# EAGLE board SmartBadge (EAGLE 9.1.3)
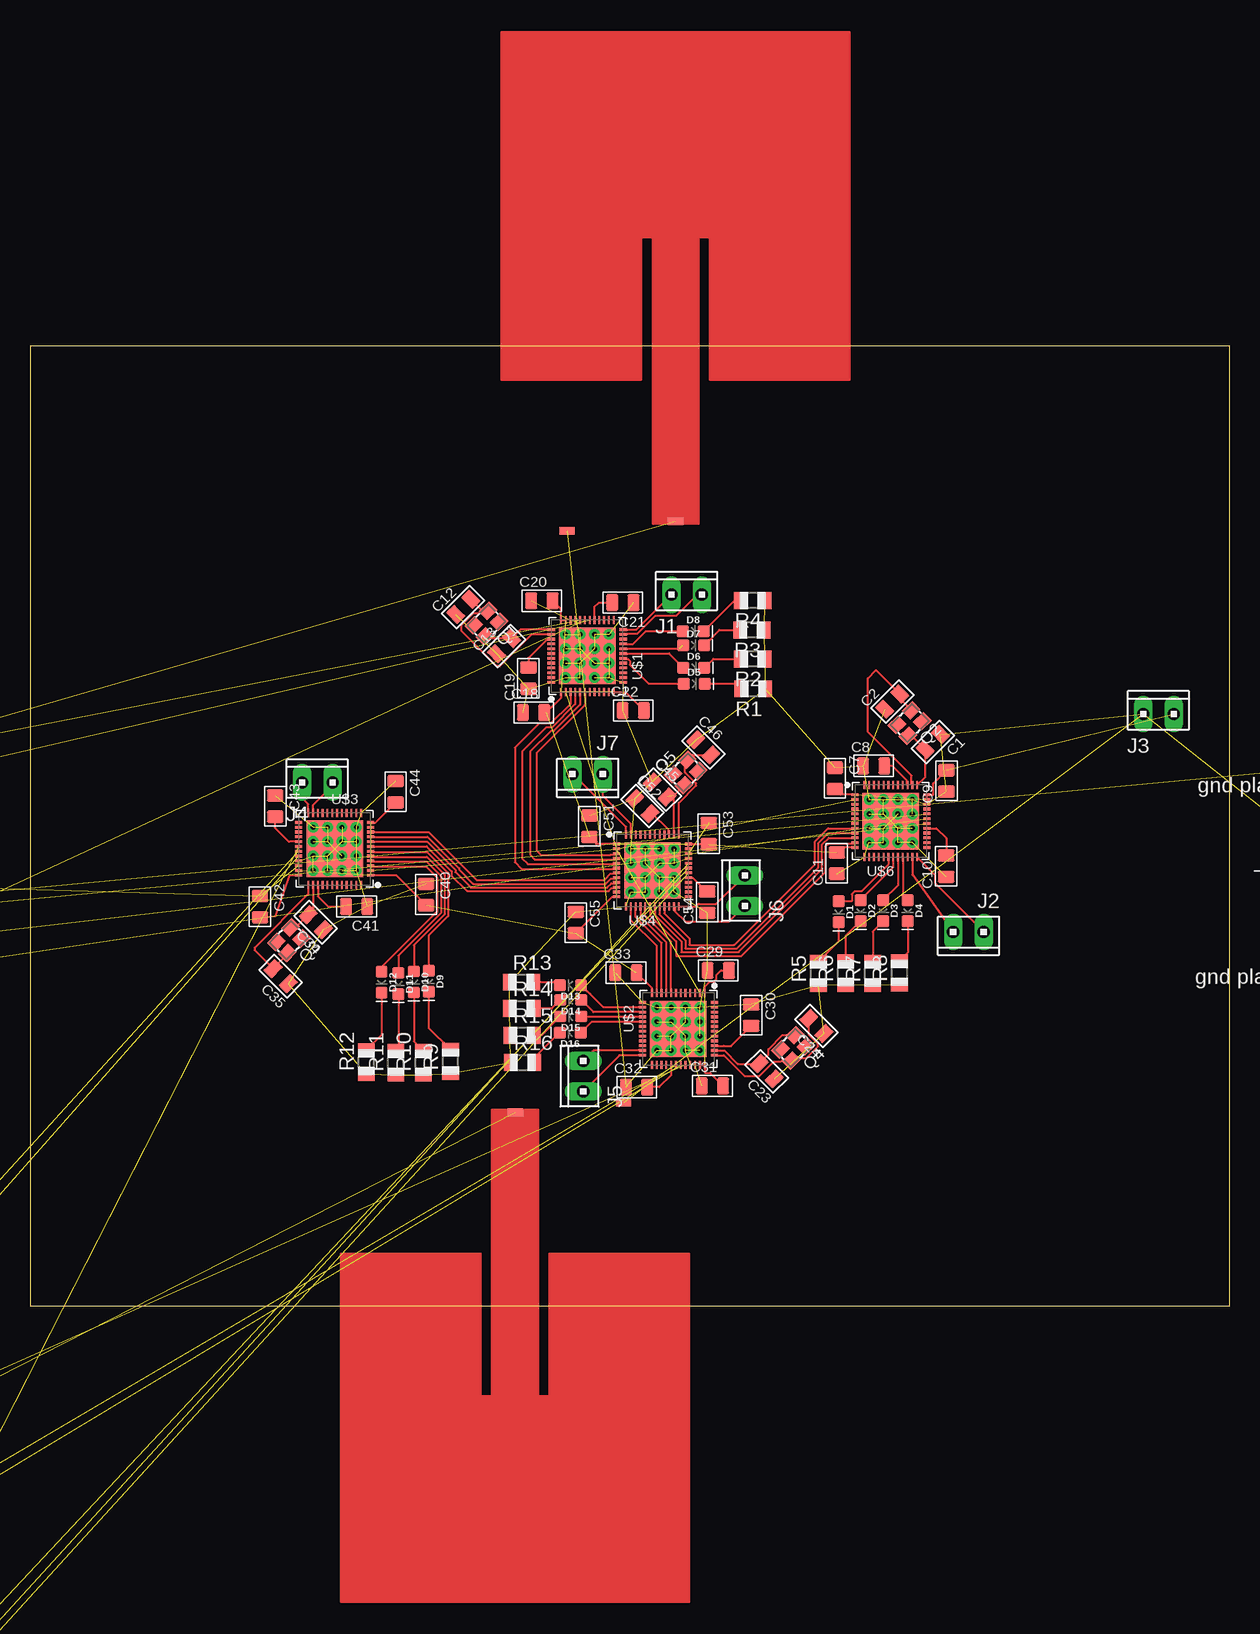
[diagram p0: board, top side]
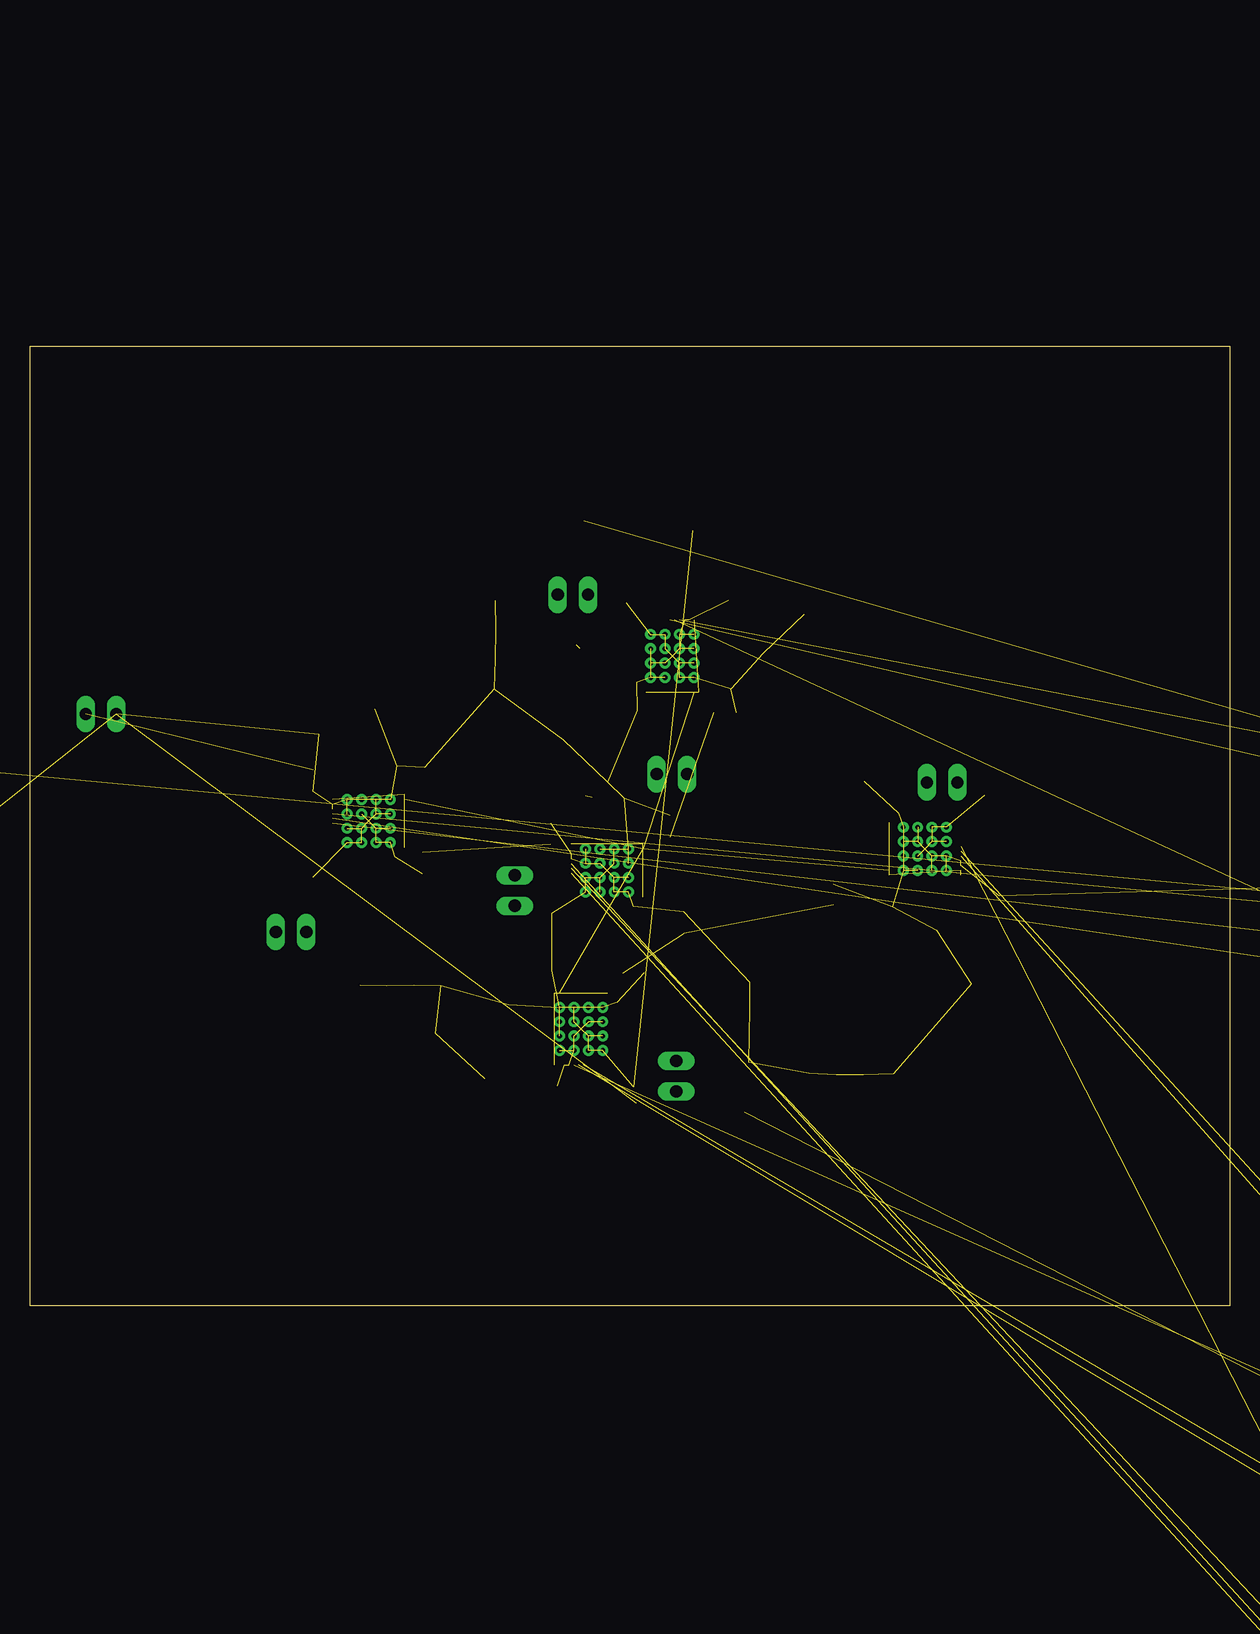
[diagram p1: board, bottom side, seen from below]

Size 100 x 80 mm. Coordinates in mm from the lower left corner, seen from the top.
Outline: 0,0 100,0 100,80 0,80 0,0
Copper layers (1*16): Top 0.035mm / dielectric 1.5mm / Bottom 0.035mm
Design rules "default": minimum track width 6mil, minimum drill 0.35mm, track to track 6mil, track to pad 6mil, pad to pad 6mil, via to via 6mil, smd to smd 6mil, copper to edge 40mil, drill to drill 6mil, minimum pad ring 10mil, minimum via ring 8mil, stop-mask expansion 4mil, vias tented up to drill 0mil, thermal gap 10mil

## Footprints (pad centres in the part's own frame; a part is rotated, then mirrored left to right if it is on the bottom)
C0805 = smd 1.397 x 1.016: 1 0,0.889; 2 0,-0.889
LED-0603 = smd 1 x 1: A -0.877,0; C 0.877,0
TRACE_ANTENNA_2.4GHZ_25.7MM = smd 0.46 x 0.46: ANT 0,0.23 | smd 1 x 0.46: GND -1.18,0.23; GND2 -3.38,0.23
10X02MTA = drill 1.016 long: 1 1.27,0; 2 -1.27,0
RESC0805_L = smd 1 x 1.25: 1 -1,0; 2 1,0
2.5X2.0_KX-6 = smd 1.2 x 1: 1 -0.85,-0.65; 2 0.85,-0.65; 3 0.85,0.65; 4 -0.85,0.65
R0805 = smd 1.1 x 1.4: 1 -1,0; 2 1,0
QFN40P600X600X90-48_N = smd 0.65 x 0.2: 1 -3,2.2; 2 -3,1.8; 3 -3,1.4; 4 -3,1; 5 -3,0.6; 6 -3,0.2; 7 -3,-0.2; 8 -3,-0.6; 9 -3,-1; 10 -3,-1.4; 11 -3,-1.8; 12 -3,-2.2; 25 3,-2.2; 26 3,-1.8; 27 3,-1.4; 28 3,-1; 29 3,-0.6; 30 3,-0.2; 31 3,0.2; 32 3,0.6; 33 3,1; 34 3,1.4; 35 3,1.8; 36 3,2.2 | smd 0.2 x 0.65: 13 -2.2,-3; 14 -1.8,-3; 15 -1.4,-3; 16 -1,-3; 17 -0.6,-3; 18 -0.2,-3; 19 0.2,-3; 20 0.6,-3; 21 1,-3; 22 1.4,-3; 23 1.8,-3; 24 2.2,-3; 37 2.2,3; 38 1.8,3; 39 1.4,3; 40 1,3; 41 0.6,3; 42 0.2,3; 43 -0.2,3; 44 -0.6,3; 45 -1,3; 46 -1.4,3; 47 -1.8,3; 48 -2.2,3 | smd 4.7 x 4.7: PAD 0,0 | drill 0.4: PAD@VIA01 -1.8,1.8; PAD@VIA02 -1.8,0.6; PAD@VIA03 -1.8,-0.6; PAD@VIA04 -1.8,-1.8; PAD@VIA05 -0.6,1.8; PAD@VIA06 -0.6,0.6; PAD@VIA07 -0.6,-0.6; PAD@VIA08 -0.6,-1.8; PAD@VIA09 0.6,1.8; PAD@VIA10 0.6,0.6; PAD@VIA11 0.6,-0.6; PAD@VIA12 0.6,-1.8; PAD@VIA13 1.8,1.8; PAD@VIA14 1.8,0.6; PAD@VIA15 1.8,-0.6; PAD@VIA16 1.8,-1.8
YAGIUDA = smd 3.81 x 34.29: P$1 0,0; P$2 19.265,-0.1; P$3 38.47,0.19 | smd 3.05 x 22.48: P$4 -18.92,11.24 | smd 3.05 x 22.48 bottom: P$5 -18.94,-11.25 | smd 0.406 x 0.203: P$6 -36.299,0 | smd 0.406 x 0.203 bottom: P$7 -36.311,0.012
PATCH = smd 1.27 x 0.635: P$1 -0.018,-11.677; P$2 -9.047,-12.48

## Placement (x,y rotation side)
C1  12pF  [C0805]  75.26,47.02 315 top
C2  12pF  [C0805]  71.88,50.37 135 top
C3  2.2nF  [C0805]  -27.94,29.21 0 top  (outside the outline)
C4  1.0pF  [C0805]  -34.29,29.21 0 top  (outside the outline)
C5  2.2pF  [C0805]  -40.64,29.21 0 top  (outside the outline)
C6  1.5pF  [C0805]  -15.24,34.29 0 top  (outside the outline)
C7  100nF  [C0805]  67.11,43.97 0 top
C8  100nF  [C0805]  70.33,45.01 90 top
C9  1.0nF  [C0805]  76.4,43.76 180 top
C10  47nF  [C0805]  76.38,36.65 180 top
C11  100nF  [C0805]  67.26,36.91 180 top
C12  12pF  [C0805]  36.12,58.27 135 top
C13  12pF  [C0805]  39.52,54.99 135 top
C14  2.2nF  [C0805]  -34.29,39.37 0 top  (outside the outline)
C15  1.0pF  [C0805]  -40.64,39.37 0 top  (outside the outline)
C16  2.2pF  [C0805]  -15.24,44.45 0 top  (outside the outline)
C17  1.5pF  [C0805]  -21.59,44.45 0 top  (outside the outline)
C18  100nF  [C0805]  41.99,49.45 90 top
C19  100nF  [C0805]  41.55,52.32 180 top
C20  1.0nF  [C0805]  42.67,58.78 90 top
C21  47nF  [C0805]  49.43,58.62 270 top
C22  100nF  [C0805]  50.29,49.63 90 top
C23  12pF  [C0805]  61.42,19.56 225 top
C24  12pF  [C0805]  65.56,23.34 225 top
C25  2.2nF  [C0805]  -25.4,-30.48 0 top  (outside the outline)
C26  1.0pF  [C0805]  -19.05,-30.48 0 top  (outside the outline)
C27  2.2pF  [C0805]  -44.45,-36.83 0 top  (outside the outline)
C28  1.5pF  [C0805]  -38.1,-36.83 0 top  (outside the outline)
C29  100nF  [C0805]  57.38,27.97 90 top
C30  100nF  [C0805]  60.12,24.23 0 top
C31  1.0nF  [C0805]  56.9,18.34 90 top
C32  47nF  [C0805]  50.57,18.24 90 top
C33  100nF  [C0805]  49.68,27.76 90 top
C34  12pF  [C0805]  23.83,31.98 225 top
C35  12pF  [C0805]  20.9,27.48 225 top
C36  2.2nF  [C0805]  -19.05,-41.91 0 top  (outside the outline)
C37  1.0pF  [C0805]  -44.45,-46.99 0 top  (outside the outline)
C38  2.2pF  [C0805]  -38.1,-46.99 0 top  (outside the outline)
C39  1.5pF  [C0805]  -31.75,-46.99 0 top  (outside the outline)
C40  100nF  [C0805]  33.02,34.29 0 top
C41  100nF  [C0805]  27.23,33.3 270 top
C42  1.0nF  [C0805]  19.18,33.27 0 top
C43  47nF  [C0805]  20.45,41.66 0 top
C44  100nF  [C0805]  30.48,42.85 0 top
C45  12pF  [C0805]  52.5,43.05 45 top
C46  12pF  [C0805]  56.13,46.56 45 top
C47  2.2nF  [C0805]  -38.1,-74.93 0 top  (outside the outline)
C48  1.0pF  [C0805]  -31.75,-74.93 0 top  (outside the outline)
C49  2.2pF  [C0805]  -44.45,-80.01 0 top  (outside the outline)
C50  1.5pF  [C0805]  -38.1,-80.01 0 top  (outside the outline)
C51  100nF  [C0805]  46.63,39.98 0 top
C52  100nF  [C0805]  51.05,41.66 45 top
C53  1.0nF  [C0805]  56.59,39.37 0 top
C54  47nF  [C0805]  56.46,33.66 180 top
C55  100nF  [C0805]  45.49,31.95 0 top
D1  [LED-0603]  67.41,32.84 270 top
D2  [LED-0603]  69.24,32.94 270 top
D3  [LED-0603]  71.12,32.94 270 top
D4  [LED-0603]  73.18,32.94 270 top
D5  [LED-0603]  55.37,51.87 0 top
D6  [LED-0603]  55.35,53.19 0 top
D7  [LED-0603]  55.32,55.07 0 top
D8  [LED-0603]  55.3,56.24 0 top
D9  [LED-0603]  33.25,27.05 270 top
D10  [LED-0603]  32,27 270 top
D11  [LED-0603]  30.71,26.87 270 top
D12  [LED-0603]  29.31,26.97 270 top
D13  [LED-0603]  45.06,26.75 180 top
D14  [LED-0603]  45.09,25.5 180 top
D15  [LED-0603]  45.09,24.13 180 top
D16  [LED-0603]  45.03,22.78 180 top
E1  ANTENNA-GROUNDEDTRACE-25.7MM  [TRACE_ANTENNA_2.4GHZ_25.7MM]  -35.79,-90.73 0 top  (outside the outline)
J1  [10X02MTA]  54.74,59.28 0 top
J2  [10X02MTA]  78.23,31.17 180 top
J3  [10X02MTA]  94.08,49.33 0 top
J4  [10X02MTA]  23.95,43.64 0 top
J5  [10X02MTA]  46.13,19.15 90 top
J6  [10X02MTA]  59.59,34.62 90 top
J7  [10X02MTA]  46.48,44.32 180 top
L1  4.7nH  [RESC0805_L]  -45.72,15.24 0 top  (outside the outline)
L2  10nH  [RESC0805_L]  -36.83,24.13 0 top  (outside the outline)
L3  3.3nH  [RESC0805_L]  -17.78,24.13 0 top  (outside the outline)
L4  4.7nH  [RESC0805_L]  -24.13,24.13 0 top  (outside the outline)
L5  10nH  [RESC0805_L]  -43.18,24.13 0 top  (outside the outline)
L6  3.3nH  [RESC0805_L]  -30.48,24.13 0 top  (outside the outline)
L7  4.7nH  [RESC0805_L]  -45.72,-24.13 0 top  (outside the outline)
L8  10nH  [RESC0805_L]  -20.32,-24.13 0 top  (outside the outline)
L9  3.3nH  [RESC0805_L]  -39.37,-24.13 0 top  (outside the outline)
L10  4.7nH  [RESC0805_L]  -33.02,-24.13 0 top  (outside the outline)
L11  10nH  [RESC0805_L]  -45.72,-30.48 0 top  (outside the outline)
L12  3.3nH  [RESC0805_L]  -26.67,-24.13 0 top  (outside the outline)
L13  4.7nH  [RESC0805_L]  -31.75,-57.15 0 top  (outside the outline)
L14  10nH  [RESC0805_L]  -39.37,-68.58 0 top  (outside the outline)
L15  3.3nH  [RESC0805_L]  -45.72,-68.58 0 top  (outside the outline)
Q1  [2.5X2.0_KX-6]  38.05,56.87 225 top
Q2  [2.5X2.0_KX-6]  73.33,48.59 225 top
Q3  [2.5X2.0_KX-6]  21.59,30.48 225 top
Q4  [2.5X2.0_KX-6]  63.63,21.51 225 top
Q5  [2.5X2.0_KX-6]  54.66,44.45 45 top
R1  R-US_R0805  [R0805]  60.3,51.44 180 top
R2  R-US_R0805  [R0805]  60.25,53.92 180 top
R3  R-US_R0805  [R0805]  60.2,56.34 180 top
R4  R-US_R0805  [R0805]  60.25,58.8 180 top
R5  R-US_R0805  [R0805]  65.74,27.71 90 top
R6  R-US_R0805  [R0805]  68,27.74 90 top
R7  R-US_R0805  [R0805]  70.26,27.71 90 top
R8  R-US_R0805  [R0805]  72.49,27.76 90 top
R9  R-US_R0805  [R0805]  35.05,20.37 90 top
R10  R-US_R0805  [R0805]  32.79,20.27 90 top
R11  R-US_R0805  [R0805]  30.51,20.27 90 top
R12  R-US_R0805  [R0805]  28.04,20.32 90 top
R13  R-US_R0805  [R0805]  40.97,26.97 0 top
R14  R-US_R0805  [R0805]  41,24.79 0 top
R15  R-US_R0805  [R0805]  41.02,22.56 0 top
R16  R-US_R0805  [R0805]  41.07,20.29 0 top
U$1  NRF51X22_QFQF  [QFN40P600X600X90-48_N]  46.46,54.18 90 top
U$2  NRF51X22_QFQF  [QFN40P600X600X90-48_N]  54.05,23.09 270 top
U$3  NRF51X22_QFQF  [QFN40P600X600X90-48_N]  25.4,38.1 180 top
U$4  NRF51X22_QFQF  [QFN40P600X600X90-48_N]  51.89,36.3 0 top
U$5  YAGI_UDA  [YAGIUDA]  143.74,35.26 0 top  (outside the outline)
U$6  NRF51X22_QFQF  [QFN40P600X600X90-48_N]  71.75,40.41 0 top
U$7  YAGI_UDA  [YAGIUDA]  -91.34,38 180 top  (outside the outline)
U$8  2.4G_PATCH  [PATCH]  53.82,77.09 0 top
U$9  2.4G_PATCH  [PATCH]  40.44,4.45 180 top

## Library data of the parts
C1-C55 = Seeed-Capacitor; MPN: CC0805MKX5R5BB226
D1-D16 = SparkFun-LED; PROD_ID: DIO-00821
E1 = SparkFun-RF
J1-J7 = con-amp
L1-L15 U$1-U$4 U$6 = Nordic_nRF
Q1-Q5 = crystal-geyer_V1_0
R1-R16 = audio amplifier example
U$5 U$7 = Myown
U$8 U$9 = Patch

## Nets
0: C1.1 C2.1 C3.1 C4.1 C6.1 C7.1 C8.1 C9.1 C10.1 C11.1 C12.1 C13.1 C14.1 C15.1 C17.1 C18.1 C19.1 C20.1 C21.1 C22.1 C23.1 C24.1 C25.1 C26.1 C28.1 C29.1 C30.1 C31.1 C32.1 C33.1 C34.1 C35.1 C36.1 C37.1 C39.1 C40.1 C41.1 C42.1 C43.1 C44.1 C45.1 C46.1 C47.1 C48.1 C50.1 C51.1 C52.1 C53.1 C54.1 C55.1 E1.GND E1.GND2 J3.2 R1.1 R2.1 R3.1 R4.1 R5.1 R6.1 R7.1 R8.1 R9.1 R10.1 R11.1 R12.1 R13.1 R14.1 R15.1 R16.1 U$1.13 U$1.33 U$1.34 U$1.PAD U$1.PAD@VIA01 U$1.PAD@VIA02 U$1.PAD@VIA03 U$1.PAD@VIA04 U$1.PAD@VIA05 U$1.PAD@VIA06 U$1.PAD@VIA07 U$1.PAD@VIA08 U$1.PAD@VIA09 U$1.PAD@VIA10 U$1.PAD@VIA11 U$1.PAD@VIA12 U$1.PAD@VIA13 U$1.PAD@VIA14 U$1.PAD@VIA15 U$1.PAD@VIA16 U$2.13 U$2.33 U$2.34 U$2.PAD U$2.PAD@VIA01 U$2.PAD@VIA02 U$2.PAD@VIA03 U$2.PAD@VIA04 U$2.PAD@VIA05 U$2.PAD@VIA06 U$2.PAD@VIA07 U$2.PAD@VIA08 U$2.PAD@VIA09 U$2.PAD@VIA10 U$2.PAD@VIA11 U$2.PAD@VIA12 U$2.PAD@VIA13 U$2.PAD@VIA14 U$2.PAD@VIA15 U$2.PAD@VIA16 U$3.13 U$3.33 U$3.34 U$3.PAD U$3.PAD@VIA01 U$3.PAD@VIA02 U$3.PAD@VIA03 U$3.PAD@VIA04 U$3.PAD@VIA05 U$3.PAD@VIA06 U$3.PAD@VIA07 U$3.PAD@VIA08 U$3.PAD@VIA09 U$3.PAD@VIA10 U$3.PAD@VIA11 U$3.PAD@VIA12 U$3.PAD@VIA13 U$3.PAD@VIA14 U$3.PAD@VIA15 U$3.PAD@VIA16 U$4.13 U$4.33 U$4.34 U$4.PAD U$4.PAD@VIA01 U$4.PAD@VIA02 U$4.PAD@VIA03 U$4.PAD@VIA04 U$4.PAD@VIA05 U$4.PAD@VIA06 U$4.PAD@VIA07 U$4.PAD@VIA08 U$4.PAD@VIA09 U$4.PAD@VIA10 U$4.PAD@VIA11 U$4.PAD@VIA12 U$4.PAD@VIA13 U$4.PAD@VIA14 U$4.PAD@VIA15 U$4.PAD@VIA16 U$5.P$5 U$6.13 U$6.33 U$6.34 U$6.PAD U$6.PAD@VIA01 U$6.PAD@VIA02 U$6.PAD@VIA03 U$6.PAD@VIA04 U$6.PAD@VIA05 U$6.PAD@VIA06 U$6.PAD@VIA07 U$6.PAD@VIA08 U$6.PAD@VIA09 U$6.PAD@VIA10 U$6.PAD@VIA11 U$6.PAD@VIA12 U$6.PAD@VIA13 U$6.PAD@VIA14 U$6.PAD@VIA15 U$6.PAD@VIA16 U$7.P$5 U$8.P$2 U$9.P$2
DCC: U$1.2 U$2.2 U$3.2 U$4.2 U$6.2
N$1: C8.2 U$6.39
N$2: C1.2 Q2.3 U$6.37
N$3: C10.2 U$6.29
N$4: C2.2 Q2.1 U$6.38
N$5: C5.1 L1.2 U$6.32
N$6: L1.1 L2.2 U$6.31
N$7: C3.2 L2.1 U$6.30
N$8: C4.2 C5.2 L3.1
N$9: C6.2 L3.2 U$5.P$4
N$10: C13.2 Q1.3 U$1.37
N$11: C12.2 Q1.1 U$1.38
N$12: C19.2 U$1.39
N$13: C21.2 U$1.29
N$14: C16.1 L4.2 U$1.32
N$15: L4.1 L5.2 U$1.31
N$16: C14.2 L5.1 U$1.30
N$17: C15.2 C16.2 L6.1
N$18: C17.2 L6.2 U$8.P$1
N$19: C24.2 Q4.3 U$2.37
N$20: C23.2 Q4.1 U$2.38
N$21: C30.2 U$2.39
N$22: C32.2 U$2.29
N$23: C27.1 L7.2 U$2.32
N$24: L7.1 L8.2 U$2.31
N$25: C25.2 L8.1 U$2.30
N$26: C26.2 C27.2 L9.1
N$27: C28.2 L9.2 U$9.P$1
N$28: C35.2 Q3.3 U$3.37
N$29: C34.2 Q3.1 U$3.38
N$30: C41.2 U$3.39
N$31: C43.2 U$3.29
N$32: C38.1 L10.2 U$3.32
N$33: L10.1 L11.2 U$3.31
N$34: C36.2 L11.1 U$3.30
N$35: C37.2 C38.2 L12.1
N$36: C39.2 L12.2 U$7.P$4
N$37: C46.2 Q5.3 U$4.37
N$38: C45.2 Q5.1 U$4.38
N$39: C52.2 U$4.39
N$40: C54.2 U$4.29
N$41: C49.1 L13.2 U$4.32
N$42: L13.1 L14.2 U$4.31
N$43: C47.2 L14.1 U$4.30
N$44: C48.2 C49.2 L15.1
N$45: C50.2 E1.ANT L15.2
N$46: U$1.6 U$4.3
N$47: U$1.5 U$4.4
N$48: U$1.4 U$4.5
N$49: U$1.3 U$4.6
N$50: J6.2 U$4.23
N$51: U$4.41
N$52: U$4.42
N$53: U$4.43
N$54: U$3.7 U$4.10
N$55: U$3.8 U$4.9
N$56: U$3.9 U$4.8
N$57: U$3.10 U$4.7
N$58: U$2.8 U$4.17
N$59: U$2.9 U$4.16
N$60: U$2.10 U$4.15
N$61: U$2.11 U$4.14
N$62: D1.A U$6.18
N$63: D2.A U$6.19
N$64: D3.A U$6.20
N$65: D4.A U$6.21
N$66: D5.A U$1.18
N$67: D6.A U$1.19
N$68: D7.A U$1.20
N$69: D8.A U$1.21
N$70: D12.A U$3.3
N$71: D11.A U$3.4
N$72: D10.A U$3.5
N$73: D9.A U$3.6
N$74: D13.A U$2.14
N$75: D14.A U$2.15
N$76: D15.A U$2.16
N$77: D16.A U$2.17
N$78: D5.C R1.2
N$79: D6.C R2.2
N$80: D7.C R3.2
N$81: D8.C R4.2
N$82: D1.C R5.2
N$83: D2.C R6.2
N$84: D3.C R7.2
N$85: D4.C R8.2
N$86: D13.C R13.2
N$87: D14.C R14.2
N$88: D15.C R15.2
N$89: D16.C R16.2
N$90: D12.C R12.2
N$91: D11.C R11.2
N$92: D10.C R10.2
N$93: D9.C R9.2
N$94: U$4.21 U$6.8
N$95: U$4.20 U$6.9
N$96: J4.1 U$3.23
N$97: J4.2 U$3.24
N$98: J5.1 U$2.23
N$99: J5.2 U$2.24
N$102: J2.1 U$6.23
N$103: J2.2 U$6.24
N$104: J1.1 U$1.23
N$105: J1.2 U$1.24
N$106: J6.1 U$4.24
N$107: U$4.19 U$6.10
N$108: U$4.18 U$6.11
N$109: J7.1 U$4.48
N$110: J7.2 U$4.47
VCC: C7.2 C9.2 C11.2 C18.2 C20.2 C22.2 C29.2 C31.2 C33.2 C40.2 C42.2 C44.2 C51.2 C53.2 C55.2 J3.1 U$1.1 U$1.12 U$1.35 U$1.36 U$2.1 U$2.12 U$2.35 U$2.36 U$3.1 U$3.12 U$3.35 U$3.36 U$4.1 U$4.12 U$4.35 U$4.36 U$6.1 U$6.12 U$6.35 U$6.36

## Tracks (layer width: path | path; a pad name or v marks a point on that pad's centre or on a via)
0  (172 unrouted)
DCC  (4 unrouted)
N$1
  Top 0.152: U$6.39 73.08,43.48 73.08,43.81 71.89,45.01 C8.2
N$2
  Top 0.152: U$6.37 74.63,44.09 C1.2 73.49,47.53 Q2.3
N$3
  Top 0.152: U$6.29 75.56,39.81 76.38,38.99 C10.2
N$4
  Top 0.152: U$6.38 73.48,43.48 73.48,44.2 69.84,47.84 69.84,52.31 70.52,52.99 C2.2 72.51,50.61 Q2.1
N$5  (2 unrouted)
N$6  (2 unrouted)
N$7  (2 unrouted)
N$8  (2 unrouted)
N$9  (2 unrouted)
N$10
  Top 0.152: U$1.37 40.91,56.38 C13.2 38.1,55.62 Q1.3
N$11
  Top 0.152: U$1.38 41.82,55.98 39.18,53.33 38.88,53.33 35.98,56.23 35.98,56.75 36.97,57.74 37.99,57.74 Q1.1 37.71,57.93 C12.2
N$12
  Top 0.152: U$1.39 43.38,55.51 43.05,55.51 41.55,54.01 C19.2
N$13
  Top 0.152: U$1.29 47.06,58.23 47.04,58.24 47.42,58.62 C21.2
N$14  (2 unrouted)
N$15  (2 unrouted)
N$16  (2 unrouted)
N$17  (2 unrouted)
N$18  (2 unrouted)
N$19
  Top 0.152: U$2.37 57.85,20.89 59.58,19.16 60.8,19.16 62.01,20.37 62.59,20.37 62.68,20.45 Q4.3 63.68,20.65 64.71,20.65 65.69,21.63 65.69,21.82 64.93,22.59 C24.2
N$20
  Top 0.152: U$2.38 57.88,21.29 58.98,20.19 C23.2 61.56,20.96 61.56,21.4 62.74,22.57 Q4.1
N$21
  Top 0.152: U$2.39 57.84,21.69 57.86,21.67 58.45,21.67 C30.2
N$22
  Top 0.152: U$2.29 53.45,19.27 53.47,19.25 52.45,18.24 C32.2
N$23  (2 unrouted)
N$24  (2 unrouted)
N$25  (2 unrouted)
N$26  (2 unrouted)
N$27  (2 unrouted)
N$28
  Top 0.152: U$3.37 23.2,34.33 18.72,29.84 18.72,29.67 C35.2 21.45,29.28 Q3.3
N$29
  Top 0.152: U$3.38 23.6,33.01 C34.2 22.13,31.54 Q3.1
N$30
  Top 0.152: U$3.39 24,34.14 24.84,33.3 C41.2
N$31
  Top 0.152: U$3.29 21.63,38.7 21.61,38.68 20.45,39.85 C43.2
N$32  (2 unrouted)
N$33  (2 unrouted)
N$34  (2 unrouted)
N$35  (2 unrouted)
N$36  (2 unrouted)
N$37
  Top 0.152: U$4.37 54.09,41.93 55.53,43.37 55.53,43.55 54.61,44.47 54.61,45.31 Q5.3 55.22,45.93 C46.2
N$38  (1 unrouted)
  Top 0.152: U$4.38 53.69,42.56 Q5.1
N$39
  Top 0.152: U$4.39 53.22,39.37 53.22,39.7 51.83,41.09 C52.2
N$40
  Top 0.152: U$4.29 55.22,35.7 56.42,34.5 C54.2
N$41  (2 unrouted)
N$42  (2 unrouted)
N$43  (2 unrouted)
N$44  (2 unrouted)
N$45  (2 unrouted)
N$46
  Top 0.152: U$1.6 46.26,50.09 42.24,46.07 42.24,37.97 42.62,37.59 48.36,37.59 48.4,37.62 48.82,37.62 U$4.3
N$47
  Top 0.152: U$1.5 45.86,50.12 43.66,47.92 43.42,47.92 41.69,46.19 41.69,37.61 42.08,37.23 48.82,37.23 U$4.4
N$48
  Top 0.152: U$1.4 45.46,50.15 43.53,48.22 43.03,48.22 41.04,46.22 41.04,37.31 41.52,36.83 48.82,36.83 U$4.5
N$49
  Top 0.152: U$4.6 48.82,36.42 40.99,36.42 40.43,36.98 40.43,46.54 42.42,48.53 43.4,48.53 45.06,50.18 U$1.3
N$50
  Top 0.152: U$4.23 53.76,33.23 53.76,32.89 54.63,32.03 58.27,32.03 J6.2
N$54
  Top 0.152: U$3.7 33.08,38.3 35.17,36.21 35.17,35.85 36.45,34.57 48.23,34.57 48.49,34.83 48.82,34.83 U$4.10
N$55
  Top 0.152: U$3.8 33.11,38.7 35.47,36.34 35.47,36.16 36.75,34.87 48.11,34.87 48.46,35.23 48.82,35.23 U$4.9
N$56
  Top 0.152: U$3.9 33.14,39.1 35.78,36.47 35.78,36.36 36.96,35.18 47.98,35.18 48.43,35.62 48.82,35.62 U$4.8
N$57
  Top 0.152: 28.47,39.43 U$3.10 33.22,39.5 37.21,35.51 47.88,35.51 48.4,36.02 48.82,36.02 U$4.7
N$58
  Top 0.152: U$2.8 53.45,30.37 51.28,32.54 51.28,33.29 U$4.17
N$59
  Top 0.152: U$2.9 53.05,30.29 50.93,32.41 50.93,33.26 U$4.16
N$60
  Top 0.152: U$2.10 52.65,30.25 50.47,32.44 50.47,33.27 U$4.15
N$61
  Top 0.152: U$2.11 52.25,29.99 50.11,32.13 50.11,33.27 U$4.14
N$62
  Top 0.152: U$6.18 71.56,36.78 69.32,34.55 68.73,34.55 68.51,34.33 68.51,33.74 68.49,33.72 D1.A
N$63
  Top 0.152: U$6.19 71.95,36.55 69.24,33.83 D2.A
N$64
  Top 0.152: U$6.20 72.36,35.06 D3.A
N$65
  Top 0.152: U$6.21 72.75,34.24 D4.A
N$66
  Top 0.152: U$1.18 49.53,53.91 49.86,53.91 50.01,53.76 50.01,53.42 51.57,51.87 D5.A
N$67
  Top 0.152: U$1.19 53.28,54.38 D6.A
N$68  (1 unrouted)
  Top 0.152: U$1.20 54.16,54.78
N$69
  Top 0.152: U$1.21 50.28,55.18 51.33,56.24 D8.A
N$70
  Top 0.152: U$3.3 28.47,36.63 33.03,36.63 33.95,35.71 33.95,32.87 29.31,28.24 D12.A
N$71
  Top 0.152: U$3.4 28.47,37.03 33.06,37.03 34.25,35.83 34.25,32.75 30.71,29.2 D11.A
N$72
  Top 0.152: U$3.5 28.47,37.43 33.09,37.43 34.56,35.96 34.56,32.62 32,30.07 D10.A
N$73
  Top 0.152: U$3.6 28.47,37.83 33.12,37.83 34.86,36.09 34.86,32.49 33.25,30.88 D9.A
N$74
  Top 0.152: U$2.14 47.79,24.89 46.69,25.99 46.69,26.01 46.47,26.23 46.45,26.23 D13.A
N$75
  Top 0.152: U$2.15 46.98,24.49 D14.A
N$76
  Top 0.152: U$2.16 46,24.09 D15.A
N$77
  Top 0.152: U$2.17 46.82,23.69 D16.A
N$78
  Top 0.152: D5.C 58.87,51.87 R1.2
N$79
  Top 0.152: D6.C 56.96,53.92 R2.2
N$80
  Top 0.152: R3.2 57.47,56.34 56.9,55.77 56.9,55.73 56.68,55.51 56.64,55.51 D7.C
N$81
  Top 0.152: D8.C 58.74,58.8 R4.2
N$82
  Top 0.152: R5.2 67.41,30.39 D1.C
N$83
  Top 0.152: D2.C 68,30.82 R6.2
N$84
  Top 0.152: D3.C 70.26,31.2 R7.2
N$85
  Top 0.152: D4.C 73.18,29.45 R8.2
N$86
  Top 0.152: 42.43,27.43 R13.2 43.95,26.98 D13.C
N$87
  Top 0.152: 42.39,24.39 R14.2 43.5,24.79 D14.C
N$88
  Top 0.152: D15.C 42.63,22.55 R15.2
N$89
  Top 0.152: D16.C 42.07,20.7 R16.2
N$90
  Top 0.152: D12.C 29.31,22.59 R12.2
N$91
  Top 0.152: D11.C 30.71,21.47 R11.2
N$92
  Top 0.152: D10.C 32,22.06 R10.2
N$93
  Top 0.152: R9.2 33.25,23.17 D9.C
N$94
  Top 0.152: U$4.21 52.89,32.73 52.88,32.72 54.97,30.63 54.97,30.1 58.73,30.1 65.42,36.79 65.42,38.7 66.53,39.81 U$6.8
N$95
  Top 0.152: U$4.20 52.49,32.66 52.48,32.64 54.63,30.48 54.63,29.79 58.95,29.79 65.72,36.56 65.72,38.58 66.56,39.41 U$6.9
N$96
  Top 0.152: U$3.23 23.6,41.74 25.22,43.36 J4.1
N$97
  Top 0.152: U$3.24 23.2,41.82 22.68,42.34 J4.2
N$98
  Top 0.152: U$2.23 46.99,21.29 J5.1
N$99
  Top 0.152: U$2.24 49.13,20.89 J5.2
N$102
  Top 0.152: U$6.23 73.56,35.94 J2.1
N$103
  Top 0.152: U$6.24 75.45,35.92 75.45,35.23 79.5,31.18 J2.2
N$104
  Top 0.152: U$1.23 49.53,56.05 50.66,56.05 52.15,57.53 53.88,57.53 55.63,59.28 J1.1
N$105
  Top 0.152: U$1.24 50.56,56.38 J1.2
N$106
  Top 0.152: U$4.24 55.54,33.3 55.74,33.5 57.2,33.5 J6.1
N$107
  Top 0.152: U$6.10 66.59,39.01 66.03,38.45 66.03,36.44 59.08,29.49 54.3,29.49 54.3,30.38 52.09,32.59 U$4.19
N$108
  Top 0.152: U$6.11 68.68,38.54 66.55,38.54 66.33,38.32 66.33,36.19 59.33,29.18 53.87,29.18 53.87,30.38 51.69,32.56 51.69,32.57 U$4.18
N$109
  Top 0.152: U$4.48 49.69,39.92 45.29,44.32 J7.1
N$110
  Top 0.152: U$4.47 50.09,40.18 47.75,42.52 J7.2
VCC  (16 unrouted)
  Top 0.152: C42.2 20.47,32.49 21.64,35.87 U$3.36 | U$3.1 30.52,35.9 C40.2 | U$3.12 28.82,40.3 C44.2 | U$2.35 U$2.36 56.25,19.47 56.29,19.43 56.69,19.43 C31.2 | U$2.1 56.25,26.61 56.68,27.04 57.02,27.04 57.23,27.25 57.23,27.58 57.61,27.96 C29.2 | U$2.12 51.85,26.48 C33.2 | U$6.35 U$6.36 75.28,42.61 75.31,42.65 75.31,43.56 C9.2 | U$6.1 67.57,42.61 C7.2 | U$1.1 44.26,50.68 43.03,49.45 C18.2 | C22.2 49.63,51.18 U$1.12 | U$1.35 U$1.36 44.26,58.08 C20.2 | U$4.1 47.23,38.5 C51.2 | U$4.12 48.52,34.1 C55.2 | U$4.35 U$4.36 56.58,38.5 C53.2 | U$6.12 67.67,38.21 C11.2